# Altium PCB uku207_220_2.PcbDoc (part 4 of 4)
Units mm, origin at the board's own origin, x right, y up, seen from the top; angles counter-clockwise.
Board outline 334.15 x 155.4 mm, 2 copper layers (Top Layer, Bottom Layer); 372 components, 588 nets, 1281 pads, 677 vias.
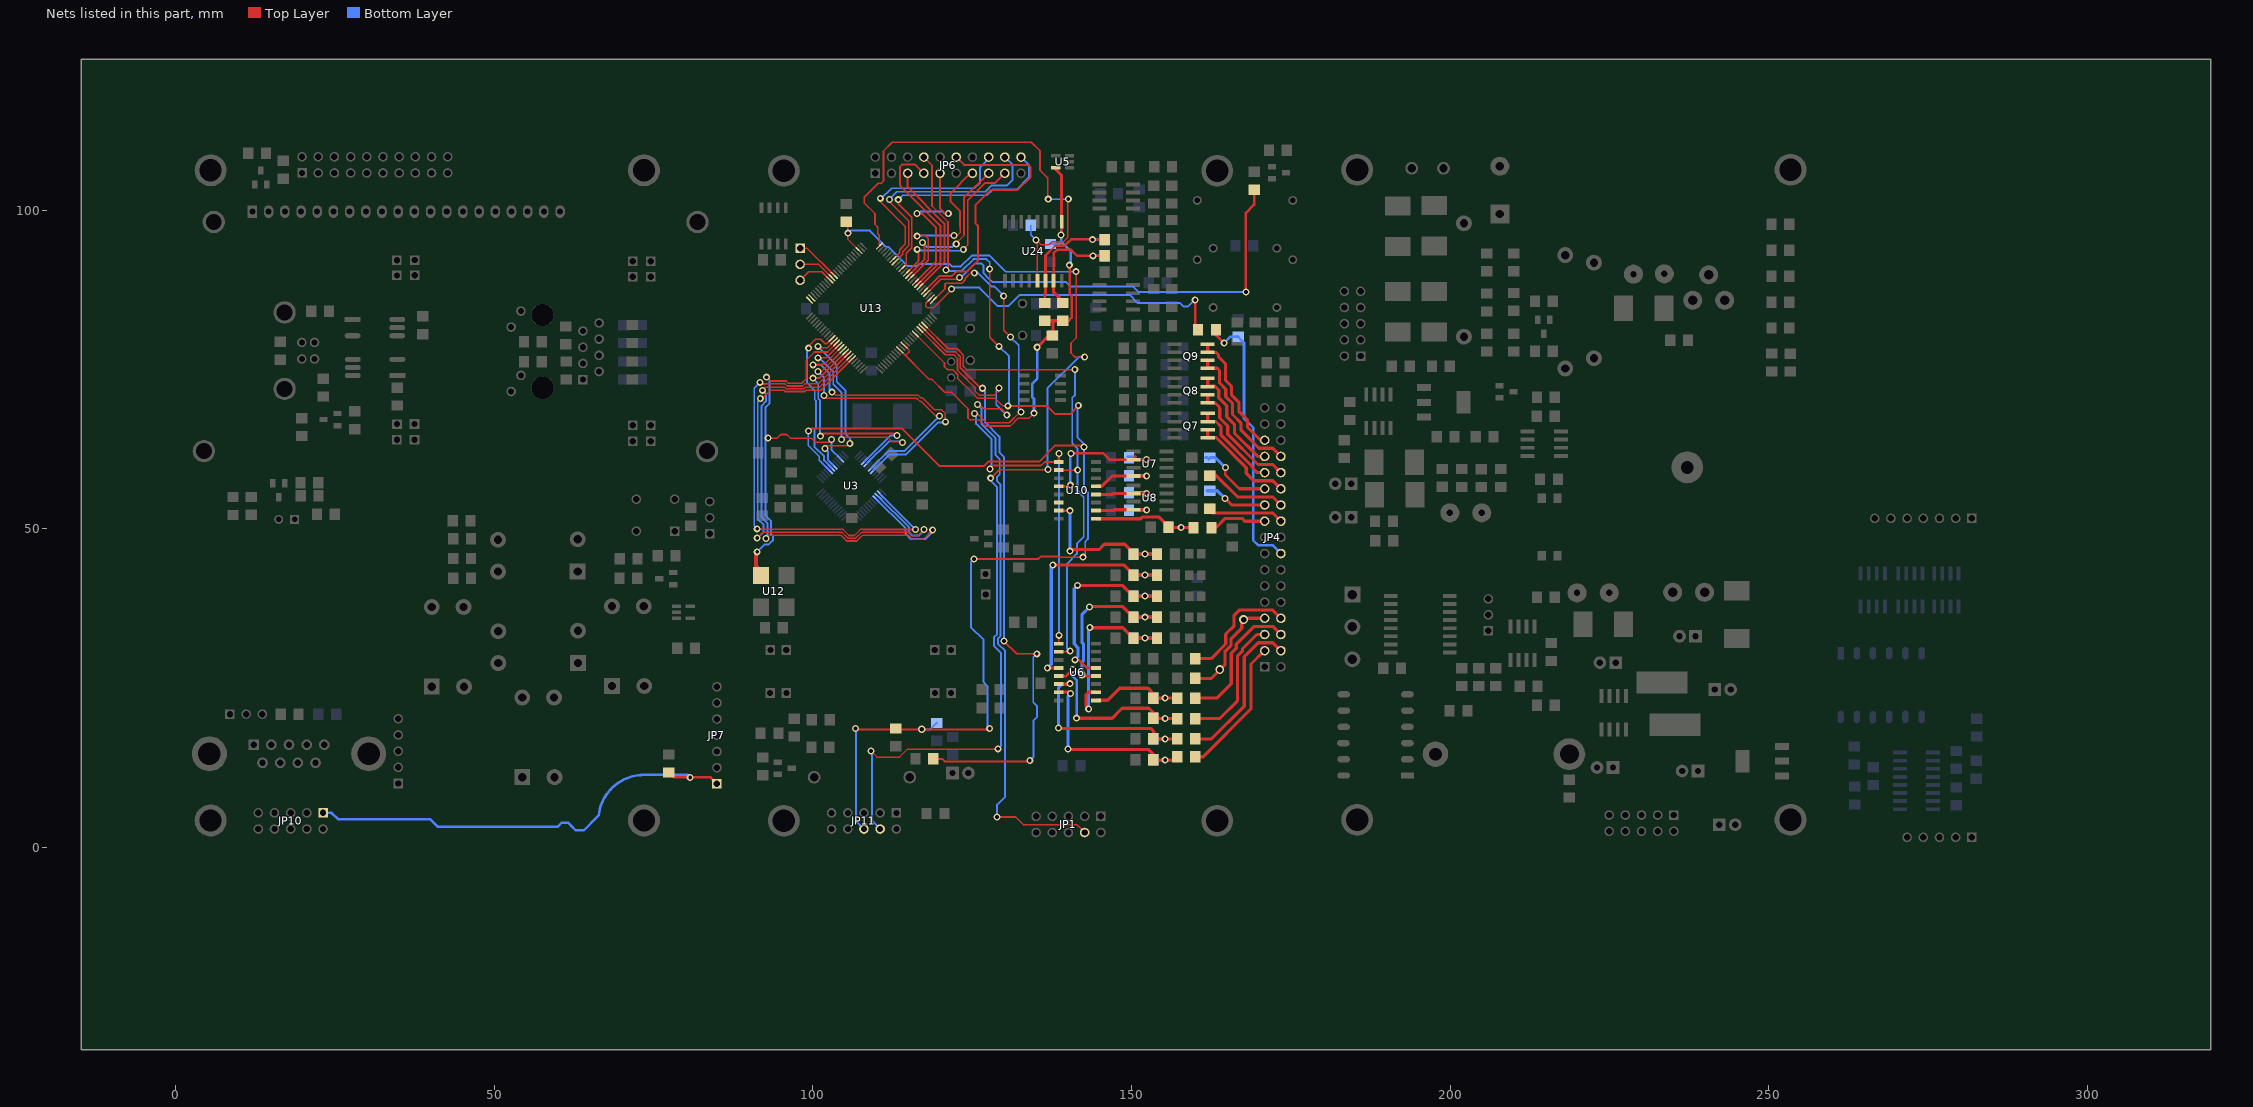
[diagram p4: the nets of this part, all layers, seen from the top]

## Via types
v1: diameter 1.1, hole 0.6, Top Layer to Bottom Layer, 590 vias
v2: diameter 1.3, hole 0.7, Top Layer to Bottom Layer, 36 vias
v3: diameter 1.5, hole 1, Top Layer to Bottom Layer, 18 vias
v4: diameter 1.5, hole 0.7, Top Layer to Bottom Layer, 16 vias
v5: diameter 1.2, hole 0.7, Top Layer to Bottom Layer, 13 vias
v6: diameter 1.4, hole 0.9, Top Layer to Bottom Layer, 3 vias
v7: diameter 1.2, hole 0.6, Top Layer to Bottom Layer, 1 vias

## Nets (pads, with @x,y where several pads share a name; then routed paths per layer and width w, separated by ;. In a path a pad name is that pad's centre, name@x,y a point inside that pad or via, vN(x,y) a via of type N, cw(c..) or ccw(c..) an arc to the next point about the centre after c; other vN are vias at no path point) (continued)
P0_29: R72.1 U13.29 | length 71.2
  Top Layer w0.25: U13.29@117.862,86.948 120.064,89.15 122.7,89.15 v1(123,89.45)
  Top Layer w0.4: v1(167.95,87.15) 167.95,99.6 169.243,100.893 169.243,103.226 R72.1@169.243,103.25
  Bottom Layer w0.3: v1(123,89.45) 123.258,89.45 125.43,91.622 126.481,91.622 126.781,91.322 126.781,90.119 127.618,89.283 128.15,88.75 139.7,88.75 140.4,88.05 150.2,88.05 151.1,87.15 v1(167.95,87.15)
P0_30: JP6.12 U13.30 | length 43.6
  Top Layer w0.3: U13.30@117.509,87.302 119.907,89.7 121.858,89.7 122.53,90.372 124.18,90.372 125.88,92.072 125.88,97.574 125.5,97.954 125.5,100.8 127.85,103.15 132.1,103.15 134.15,105.2 134.15,106.75 133.8,107.1 123.74,107.1 JP6.12@122.5,108.34
P1_0: U3.3 U13.95 | length 78.6
  Top Layer w0.25: v1(91.273,48.562) 92.161,49.45 104.581,49.45 105.499,48.532 106.705,48.532 107.623,49.45 115.15,49.45 115.7,48.9 116.45,48.9 v1(117.45,49.9) ; v1@91.65,70.25 91.75,70.25 91.85,70.25 91.9,70.3 93.35,71.75 95.426,71.75 95.616,71.56 98.784,71.56 98.974,71.75 101.25,71.75 U13.95@106.195,76.695
  Bottom Layer w0.3: v1(91.273,48.562) 92.273,49.562 92.273,50.613 91.35,51.536 91.35,69.95 v1@91.65,70.25 ; U3.3@110.251,55.072 115.1,50.223 115.1,49.45 115.6,48.95 116.65,48.95 117.45,49.75 v1(117.45,49.9)
  other v1: 91.75,70.45
P1_1: U3.4 U13.94 | length 81.1
  Top Layer w0.25: v1(92.1,71.75) 92.6,72.25 95.534,72.25 95.794,71.99 98.606,71.99 98.866,72.25 101.078,72.25 U13.94@105.841,77.013 ; v1(92.673,48.512) 93.161,49 104.423,49 105.32,48.102 106.883,48.102 107.781,49 114.95,49 115.55,48.4 117.35,48.4 v1(118.8,49.85)
  Bottom Layer w0.3: v1(92.1,71.75) 92.648,71.202 92.648,69.991 91.95,69.293 91.95,51.836 92.873,50.913 92.873,48.712 v1(92.673,48.512) ; U3.4@109.898,54.719 114.55,50.066 114.55,49.2 115.35,48.4 117.65,48.4 118.8,49.55 v1(118.8,49.85)
P1_4: U3.2 U13.93 | length 73.1
  Top Layer w0.25: v1@91.273,49.913 104.226,49.906 ; 92.55,72.75 95.642,72.75 95.972,72.42 98.428,72.42 98.758,72.75 100.836,72.75 U13.93@105.488,77.402 ; 104.226,49.913 104.726,49.913 105.677,48.962 106.527,48.962 107.477,49.913 107.877,49.913 ; 107.877,49.904 v1(116.1,49.9)
  Top Layer w0.3: v1(91.7,73) 91.95,72.75 92.55,72.75
  Bottom Layer w0.3: v1(91.273,50.013) 90.8,50.485 90.8,72.1 v1(91.7,73) ; U3.2@110.605,55.426 116.1,49.931 v1(116.1,49.9)
P1_8: U3.40 U13.92 | length 35.5
  Top Layer w0.3: v1(100,73.65) 101.029,73.65 U13.92@105.134,77.756 ; v1@101.15,64.55 101.175,64.575 101.6,65 112.85,65 v1(113.2,64.65)
  Bottom Layer w0.3: v1(100,73.65) 100.85,72.8 100.85,70.45 101.15,70.15 v1@101.15,64.55 ; U3.40@108.13,60.623 112.157,64.65 v1(113.2,64.65)
  other v1: 101.2,64.55
P1_9: U3.43 U13.91 | length 43.7
  Top Layer w0.25: v1(100.8,74.7) 101.371,74.7 U13.91@104.781,78.109 ; v1(101.75,70.95) 102.2,70.5 116.3,70.5 116.75,70.05 116.95,70.05 117.493,69.507 ; 117,70 117.493,69.507 ; v1(119.85,67.7) 119.3,67.7 117.493,69.507
  Bottom Layer w0.3: v1(100.8,74.7) 101.75,73.75 v1(101.75,70.95) ; U3.43@109.191,59.563 111.878,62.25 114.4,62.25 v1(119.85,67.7)
P1_10: U3.44 U13.90 | length 46.6
  Top Layer w0.25: v1(100,75.75) 100.1,75.85 101.814,75.85 U13.90@104.427,78.463 ; v1@103.15,71.45 103.575,71.025 103.6,71 116.5,71 116.95,70.55 117.25,70.55 119.1,68.7 120.2,68.7 120.8,68.1 v1(120.8,66.8)
  Bottom Layer w0.3: v1(100,75.75) 101.25,75.75 102.6,74.4 102.6,71.85 v1(103,71.45) ; U3.44@109.544,59.209 112.035,61.7 114.65,61.7 119.65,66.7 120.7,66.7 v1(120.8,66.8)
P1_14: U3.41 U13.89 | length 35.3
  Top Layer w0.25: v1(100.8,76.85) 102.107,76.85 U13.89@104.074,78.816 ; v1(104.5,64.05) 104.8,64.35 111.8,64.35 112.5,63.65 v1@113.7,63.65
  Top Layer w0.3: v1@113.7,63.65 113.95,63.65 v1(114.05,63.55)
  Bottom Layer w0.3: v1(100.8,76.85) 101,76.85 103.2,74.65 103.2,72.7 104.5,71.4 v1(104.5,64.05) ; U3.41@108.483,60.27 111.964,63.75 v1@113.8,63.75
P1_15: U3.34 U12.3 U13.88 | length 64.3
  Top Layer w0.25: v1(92.75,73.8) 93.35,73.2 95.8,73.2 96.15,72.85 98.25,72.85 99,73.6 99,76.5 100.25,77.75 102.3,77.75 U13.88@103.72,79.17 ; v1(93,64.25) 94.408,64.25 94.974,64.816 95.924,64.816 96.49,64.25 99.75,64.25 100.4,63.6 102.5,63.6 v1(102.95,64.05)
  Top Layer w0.6: v1@91.073,46.262 91.073,44.211 91.85,43.434 U12.3@91.85,42.7
  Bottom Layer w0.3: v1@91.172,46.261 91.298,46.387 92.472,47.561 93.073,47.561 93.724,48.211 93.724,48.962 93.424,49.262 93.424,51.263 92.6,52.086 v1@92.6,64.25 ; v1(92.75,73.8) 93.2,73.35 93.2,69.7 92.6,69.1 v1@92.6,64.25 ; v1(93,64.25) v1@92.6,64.25 ; v1(102.95,64.05) 102.95,62.373 U3.34@104.347,60.977
  other v1: 91.273,46.412
P1_16: U3.31 U13.87 | length 28.1
  Top Layer w0.25: v1(100.8,78.65) 101.05,78.4 102.243,78.4 U13.87@103.366,79.523 ; v1(101.9,62.6) 101.9,62.8 102.15,63.05 105.45,63.05 v1(105.8,63.4)
  Bottom Layer w0.25: U3.31@103.232,59.97 U3.31@103.286,59.916
  Bottom Layer w0.3: v1(100.8,78.65) 103.75,75.7 103.75,73.1 105.1,71.75 105.1,64.9 105.8,64.2 v1(105.8,63.4) ; v1(101.9,62.6) 102.35,62.15 102.35,60.852 U3.31@103.232,59.97
P1_17: U3.30 U13.86 | length 25.8
  Top Layer w0.25: v1(99.35,78.35) 99.35,78.7 100.4,79.75 101.25,79.75 101.95,79.05 102.186,79.05 U13.86@103.013,79.877
  Bottom Layer w0.3: v1(99.35,78.35) 99.05,78.05 99.05,73.15 99.085,73.115 99.085,72.915 100.3,71.7 100.3,70.3 100.5,70.1 100.5,65.85 100.25,65.6 100.25,62.9 101.75,61.4 101.75,60.745 U3.30@102.933,59.563
P1_18: JP6.5 U13.32 | length 21.8
  Top Layer w0.3: JP6.5@114.88,105.8 114.88,103.67 120.65,97.9 120.65,91.857 U13.32@116.801,88.009
P1_19: JP6.7 U13.33 | length 27
  Top Layer w0.3: U13.33@116.448,88.362 120,91.914 120,97.6 113.65,103.95 113.65,106.8 114,107.15 116.07,107.15 JP6.7@117.42,105.8
P1_20: JP6.9 U13.34 | length 25.5
  Top Layer w0.3: U13.34@116.094,88.716 119.35,91.972 119.35,97.25 117.1,99.5 v1@116.55,99.5 ; JP6.9@119.96,105.8 119.96,100.24 120.975,99.225 v1@121,99.2
  Bottom Layer w0.3: v1@116.55,99.5 116.85,99.8 120.4,99.8 120.975,99.225 v1@121,99.2
  other v1: 116.35,99.5 121.25,99.5
P1_21: JP6.11 U13.35 | length 25.7
  Top Layer w0.25: v1@116.95,98.25 117.5,98.25 117.8,97.95
  Top Layer w0.3: U13.35@115.741,89.069 118.75,92.079 118.75,97 117.8,97.95 ; v1@122.2,98.35 122.2,98.45 122.2,99.85 120.6,101.45 120.6,103.9 JP6.11@122.5,105.8
  Bottom Layer w0.3: v1@116.95,98.25 116.975,98.275 117.2,98.5 122.05,98.5 122.125,98.425 v1@122.15,98.4
  other v1: 116.95,98.3 122.15,98.45
P1_21: 
P1_22: 
P1_22: 
P1_22: 
P1_22: 
P1_22: 
P1_22: 
P1_22: 
P1_22: JP6.13 U13.36 | length 27.2
  Top Layer w0.25: v1@116.65,96.1 117.55,96.1 118.1,95.55 118.1,92.136 ; v1(122.15,96.05) 122.65,96.05 123.1,96.5 123.1,97.45
  Top Layer w0.3: U13.36@115.387,89.423 118.1,92.136 ; 123.1,97.45 123.1,99.85 121.6,101.35 121.6,102.7 124.7,105.8 JP6.13@125.04,105.8
  Bottom Layer w0.3: v1@116.65,96.05 v1(122.15,96.05) v1@122.2,96.1
  other v1: 116.378,95.923
P1_23: JP6.15 U13.37 | length 25.4
  Top Layer w0.25: v1@122.4,94.75 122.425,94.775 123.7,96.05 123.7,96.15
  Top Layer w0.3: U13.37@115.034,89.776 117.5,92.243 117.5,94.75 117.278,94.972 v1@117.15,95.1 ; 123.7,96.15 123.7,101.92 JP6.15@127.58,105.8
  Bottom Layer w0.3: v1@117.15,95.1 v1@117.2,95.05 ; v1@117.2,94.9 117.203,94.897 117.85,94.25 121.9,94.25 v1@122.4,94.75
  other v1: 122.5,94.7 117.228,94.923
P1_24: JP6.17 U13.38 | length 27
  Top Layer w0.25: v1(123.6,93.85) 124.3,94.55 124.3,95.35
  Top Layer w0.3: U13.38@114.68,90.13 116.55,92 v1@116.55,93.65 ; 124.3,95.35 124.3,101.55 127.05,104.3 128.62,104.3 JP6.17@130.12,105.8
  Bottom Layer w0.25: 121.6,93.65 123.4,93.65 v1(123.6,93.85)
  Bottom Layer w0.3: v1@116.55,93.65 121.6,93.65
  other v1: 116.378,93.873
P1_25: JP6.19 U13.39 | length 29.9
  Top Layer w0.3: U13.39@114.327,90.484 115.6,91.757 v1(115.578,92.872) ; v1(122.53,92.672) 123.75,92.672 124.9,93.823 124.9,101.35 127.3,103.75 130.61,103.75 JP6.19@132.66,105.8
  Bottom Layer w0.3: v1(115.578,92.872) 122.33,92.872 v1(122.53,92.672)
P1_25: 
P1_25: 
P1_25: 
P1_25: 
P1_25: 
P1_26: JP6.20 U13.40 | length 38
  Top Layer w0.25: v1(113.4,101.65) 113.4,101 115.5,98.9 115.5,94.1 114.65,93.25 114.65,91.514 U13.40@113.973,90.837
  Bottom Layer w0.3: v1(113.4,101.65) 114.1,102.35 127.3,102.35 128.2,103.25 132,103.25 133.9,105.15 133.9,107.1 JP6.20@132.66,108.34
P1_27: JP6.18 U13.43 | length 36.9
  Top Layer w0.25: v1@111.95,101.4 115.05,98.3 115.05,94.45 114.1,93.5 114.1,93.086 U13.43@112.912,91.898 ; U13.43@112.75,91.75 U13.43@112.905,91.905
  Bottom Layer w0.3: v1@111.95,101.4 111.95,101.676 111.95,101.7 111.977,101.727 113.15,102.9 127.05,102.9 128,103.85 130.4,103.85 131.35,104.8 131.35,107.11 JP6.18@130.12,108.34
  other v1: 112.028,101.676
P1_28: JP6.16 U13.44 | length 33.2
  Top Layer w0.25: v1@110.5,101.6 110.5,101.45 114.5,97.45 114.5,94.7 114.43,94.63 114.43,94.622 113.627,93.819 113.627,93.32 U13.44@112.559,92.251
  Bottom Layer w0.3: v1@110.5,101.6 110.676,101.776 112.35,103.45 125.35,103.45 126.25,104.35 126.25,106.75 127.58,108.08 JP6.16@127.58,108.34
  other v1: 110.577,101.875
P1_29: JP6.14 U13.45 | length 31.9
  Top Layer w0.25: v1@108.926,101.875 108.926,101.725 109.151,101.499 111.127,99.524 111.327,99.524 113.977,96.873 113.977,94.823 113.177,94.023 113.177,93.577 U13.45@112.205,92.605
  Bottom Layer w0.3: v1@109.126,101.875 111.527,104.275 122.83,104.275 123.73,105.175 123.73,106.776 125.04,108.086 JP6.14@125.04,108.34
  other v1: 109.226,101.575
P1_29: 
P1_29: 
P1_29: 
P1_29: 
P1_30: U6.10 U10.10 U13.21 | length 78.8
  Top Layer w0.25: U13.21@117.509,81.998 121.257,78.25 122.65,78.25 123.6,77.3 123.6,75.5 124.1,75 v1(141.1,75) ; U10.10@138.575,59.225 141.525,59.225 v1(141.55,59.25) ; U6.10@138.58,30.718 138.598,30.7 140.328,30.7 v1@140.385,30.758
  Bottom Layer w0.3: v1@140.385,30.758 140.335,30.808 139.85,31.293 139.85,44.476 141.436,46.062 141.436,47.698 142.5,48.762 142.5,55 141.55,55.95 v1(141.55,59.25) 141.55,62.55 140.7,63.4 140.7,70.55 141.05,70.9 141.05,70.95 ; 141.1,70.95 v1(141.1,75)
  other v1: 140.385,30.858
P1_31: 
P1_31: 
P1_31: 
P1_31: 
P1_31: 
P1_31: 
P1_31: 
P1_31: 
P1_31: 
P1_31: 
P1_31: 
P1_31: 
P1_31: 
P1_31: R22.1 U13.20 | length 94.6
  Top Layer w0.25: U13.20@117.155,81.645 121.03,77.77 122.381,77.77 123.131,77.019 123.131,75.269 126.332,72.068 v1(126.632,72.068)
  Top Layer w0.3: R22.1@118.892,13.91 120.274,13.91 120.677,13.507 133.887,13.507 v1(134.034,13.653) ; v1(129.983,32.408) 131.983,30.408 v1(135.134,30.408)
  Bottom Layer w0.3: v1(126.632,72.068) 127.032,71.668 127.032,66.717 129.283,64.466 129.283,62.016 129.983,61.315 v1(129.983,32.408) ; v1(134.034,13.653) 134.634,14.254 134.634,19.955 135.184,20.505 135.184,22.206 134.584,22.806 134.584,29.858 v1(135.134,30.408)
P2_0: U13.75
P2_1: U13.74
P2_7: U13.66 X13.1 | length 5.7
  Top Layer w0.25: X13.1@98,89 99.35,90.35 101.379,90.35 U13.66@102.659,89.069
P2_8: U13.65 X14.1 | length 5.9
  Top Layer w0.25: X14.1@98,91.5 100.936,91.5 U13.65@103.013,89.423
P2_9: U13.64 X9.1 | length 7.1
  Top Layer w0.25: X9.1@97.995,94.012 99.131,94.012 U13.64@103.366,89.777
P2_10: JP11.4 R9.2 U13.53 | length 169.3
  Top Layer w0.25: R9.2@105.325,98.224 105.5,98.049 v1(105.5,96.4) 105.45,96.35 105.45,95.471 U13.53@107.256,93.666 ; v1@109.35,14.85 109.1,15.1 v1(109.1,15.15) 110.05,14.2 113.6,14.2 114.85,15.45 129,15.45 v1(129.05,15.5) ; v1(127.9,57.95) 129.25,59.3 v1(136.9,59.3) ; v1(141.3,90.35) 141.3,79.95 140.5,79.15 140.5,77.6 141.15,76.95 v1(142.65,76.95)
  Bottom Layer w0.3: v1(105.5,96.4) 105.9,96.8 108.949,96.8 111.477,94.273 111.827,94.273 114.828,91.272 116.378,91.272 116.678,91.572 121.429,91.572 121.829,91.172 123.23,91.172 124.98,92.922 127.681,92.922 130.253,90.35 v1(141.3,90.35) ; v1(109.1,15.15) 109.3,14.95 109.3,4.17 JP11.4@110.56,2.91 ; v1(127.9,57.95) 127.9,57.55 128.9,56.55 128.9,33.5 128.45,33.05 128.45,31.6 129.55,30.5 129.55,16 v1(129.05,15.5) ; v1(136.9,59.3) 136.8,59.4 136.8,72.05 141.7,76.95 v1(142.65,76.95)
P2_13: R97.1 U13.50 U24.5 | length 74.9
  Top Layer w0.25: U13.50@110.438,94.373 110.438,96.065 110.178,96.324 110.178,97.347 109.75,97.775 109.75,99.475 108.077,101.148 108.077,102.05 110.254,104.226 110.728,104.226 111.078,104.576 111.078,109.278 112.478,110.678 134.284,110.678 135.634,109.328 135.634,106.277 136.884,105.026 v1@136.884,101.776 ; v1(135.034,95.324) v1@135.235,95.123 ; U24.5@135.235,88.925 v1@135.235,95.123 ; v1(140.085,101.776) 139.985,101.676 139.985,95.724 139.285,95.024 137.485,95.024 137.035,94.574 135.784,94.574 v1@135.235,95.123
  Bottom Layer w0.3: R97.1@134.196,97.618 134.196,96.162 v1(135.034,95.324) ; v1(136.934,101.726) v1@140.035,101.726
P3_25: R84.2 U13.27 | length 53.2
  Top Layer w0.25: U13.27@118.569,86.241 117.728,85.4 117.728,84.92 117.978,84.67 118.879,84.67 121.779,87.571 v1(121.779,87.621) ; R84.2@159.889,81.219 R84.2@159.939,81.169
  Top Layer w0.4: v1(159.99,85.922) 159.99,81.663 R84.2@160.437,81.216
  Bottom Layer w0.3: v1(121.779,87.621) 122.029,87.871 126.13,87.871 129.031,84.97 130.682,84.97 132.432,86.721 149.686,86.721 150.937,85.47 157.588,85.47 158.139,84.92 158.889,84.92 159.739,85.771 159.789,85.771 v1@159.84,85.822
P3_26: U6.9 U10.9 U13.26 | length 94.6
  Top Layer w0.25: U13.26@118.923,85.887 120.729,87.694 120.729,88.421 120.879,88.571 123.43,88.571 123.93,89.071 123.93,89.321 124.98,90.372 125.33,90.372 v1@125.53,90.372 ; v1@125.582,68.317 127.232,66.667 130.833,66.667 132.516,68.35 v1(132.65,68.35) ; v1(127.8,59.4) 128.35,59.95 135.85,59.95 136.395,60.495 U10.9@138.545,60.495 ; v1(129.95,86.55) 129.95,81.15 v1(131,80.1) ; U10.9@138.55,60.5 138.55,61.35 v1@138.6,61.4 ; U6.9@138.58,31.988 138.58,32.98 v1@138.6,33
  Bottom Layer w0.3: v1@125.507,68.243 125.63,68.12 125.63,68.117 125.63,66.466 128.031,64.065 128.031,59.631 v1(127.8,59.4) ; v1@125.53,90.372 125.678,90.372 128,88.05 128.45,88.05 v1(129.95,86.55) ; v1(131,80.1) 132.3,78.8 132.3,68.55 132.575,68.275 v1@132.7,68.15 ; v1@138.6,33 138.6,33.308 v1@138.6,61.4
  other v1: 138.635,33.308 138.635,61.816 125.382,68.117 125.33,90.172
PB1: 
PB1: 
PB2: 
PB2: 
PB3: 
PB3: 
PE6: 
PE6: 
PE7: 
PQ3: 
PQ4: 
PQ5: 
PQ6: 
PROG0: 
PROG1: 
PROG1: 
PROG1: 
PWM: D2.2 JP4.16 R84.1 | length 43.8
  Top Layer w0.4: R84.1@162.897,81.247 163.237,81.247 R84.1@163.237,81.216 163.237,80.425 164.491,79.17 v1(164.541,79.17)
  Bottom Layer w0.4: v1(164.541,79.17) 165.541,80.17 D2.2@166.68,80.17 ; D2.2@166.633,80.217 D2.2@166.68,80.17 ; D2.2@166.692,80.17 D2.2@166.68,80.17 ; JP4.16@173.44,46.13 172.17,47.4 169.9,47.4 169.1,48.2 169.1,65.9 167.65,67.35 167.65,79.2 166.704,80.146 166.686,80.164 D2.2@166.68,80.17
PWM1: 
PWM2: 
REL1: 
REL1: JP4.24 Q7.5 Q7.6 | length 17.1
  Top Layer w0.5: Q7.6@161.962,65.57 Q7.5@161.962,64.3 161.962,64.288 Q7.5@162.862,64.288 ; Q7.5@162.45,64.4 162.45,64.35 163.25,64.35 168,59.6 168,58.75 169.2,57.55 172.18,57.55 JP4.24@173.44,56.29
REL2: JP4.25 Q7.7 Q7.8 | length 14.4
  Top Layer w0.5: Q7.8@161.962,68.11 Q7.7@161.962,66.84 161.974,66.85 163.25,66.85 164.05,66.05 164.05,64.7 168.9,59.85 168.9,59.65 169.72,58.83 JP4.25@170.9,58.83
REL3: JP4.26 Q8.5 Q8.6 | length 20.1
  Top Layer w0.5: Q8.6@161.95,71.065 Q8.5@161.95,69.795 161.953,69.797 162,69.75 163.15,69.75 163.8,69.1 163.8,67.8 ; 163.85,68.9 163.85,67.4 165.1,66.15 165.1,64.85 169.85,60.1 172.17,60.1 JP4.26@173.44,58.83
REL4: JP4.27 Q8.7 Q8.8 | length 17.3
  Top Layer w0.5: Q8.8@161.95,73.605 Q8.7@161.95,72.335 162.015,72.4 163.1,72.4 163.7,71.8 163.7,70.55 164.95,69.3 164.95,67.6 166.15,66.4 166.15,65.05 169.83,61.37 JP4.27@170.9,61.37
REL5: JP4.28 Q9.5 Q9.6 | length 22
  Top Layer w0.5: Q9.5@161.95,75.195 Q9.5@161.95,75.2 ; Q9.6@161.95,76.465 Q9.5@161.95,75.2 ; JP4.28@173.44,61.37 172.16,62.65 170,62.65 167.2,65.45 167.2,66.6 165.85,67.95 165.85,69.7 164.8,70.75 164.8,71.9 163.8,72.9 163.8,74.85 163.45,75.2 Q9.5@161.95,75.2
REL6: JP4.29 Q9.7 Q9.8 | length 20
  Top Layer w0.5: Q9.8@161.95,79.005 Q9.7@161.95,77.735 161.943,77.742 161.9,77.7 161.95,77.7 163.25,77.7 163.65,77.3 163.65,77 164.75,75.9 164.75,73.3 165.7,72.35 165.7,71 166.85,69.85 166.85,68.45 168.2,67.1 168.2,65.95 170.24,63.91 JP4.29@170.9,63.91
RES: C29.2 JP6.8 JP11.6 R18.1 U3.29 U13.17 | length 248.4
  Top Layer w0.25: U13.17@116.094,80.584 120.65,76.028 120.65,75.45 121.15,74.95 122,74.95 122.75,74.2 122.75,73.6 124.962,71.388 125.832,70.518 128.565,70.518 129.765,69.317 v1(130.583,69.317) ; JP6.8@117.42,108.34 118.7,107.06 118.7,100.65 121.2,98.15 v1@121.2,90.75
  Top Layer w0.3: v1(99.3,65.35) 99.7,65.75 114,65.75 119.9,59.85 126.85,59.85 127.55,60.55 135.5,60.55 138.05,63.1 142.3,63.1 v1(142.55,62.85) ; v1(106.7,18.7) 106.85,18.55 127.6,18.55 v1(127.75,18.7) ; v1(125.3,45.3) 135.4,45.3 135.8,45.7 138.45,45.7 138.6,45.55 v1@142.386,45.55 ; v1(127.75,90.8) 127.75,80.1 v1(129.2,78.65) ; v1@130.4,69.3 136.7,69.3 138,68 140.35,68 141.65,69.3 v1(141.65,69.35)
  Bottom Layer w0.25: v1(99.3,65.35) 99.3,63.05 101,61.35 101,60.788 U3.29@102.579,59.209
  Bottom Layer w0.3: v1(106.7,18.7) 106.75,18.65 106.75,4.18 JP11.6@108.02,2.91 ; v5(117.1,18.55) 118.45,18.55 R18.1@119.457,19.558 ; v1(120.879,90.622) 121.029,90.472 123.38,90.472 125.23,92.322 127.231,92.322 127.75,91.803 v1(127.75,90.8) v1@127.7,90.75 ; v1(125.3,45.3) 124.8,44.8 124.8,34.55 126.781,32.569 126.781,25.955 127.4,25.336 127.4,19.05 v1(127.75,18.7) ; v1(129.2,78.65) 130.8,77.05 130.8,69.45 v1@130.65,69.3 ; v1(141.65,69.35) 141.6,69.3 141.6,69.15 141.55,69.1 141.55,64.3 142.55,63.3 142.55,56.3 143.15,55.7 143.15,48.426 142.736,48.012 142.736,45.912 v1(142.386,45.561) ; v1@142.386,45.55 v1@142.392,45.556
RX: 
RXCAN: 
SK1: JP4.23 R43.1 | length 15.6
  Top Layer w0.4: v1(164.742,59.615) 164.742,58.465 166.916,56.29 JP4.23@170.9,56.29
  Top Layer w0.5: 166.966,56.29 JP4.23@170.9,56.29
  Bottom Layer w0.5: R43.1@161.647,61.177 R43.1@161.897,61.177 ; R43.1@162.085,61.016 162.11,60.99 R43.1@162.15,60.95 ; R43.1@162.297,61.177 163.179,61.177 v1(164.742,59.615)
SK2: JP4.22 R45.1 | length 13.7
  Top Layer w0.5: R45.1@161.641,58.365 162.297,58.365 163.285,58.365 166.65,55 172.19,55 JP4.22@173.44,53.75
SK3: JP4.21 R50.1 | length 9.9
  Top Layer w0.5: v1(164.691,54.764) 165.705,53.75 JP4.21@170.9,53.75
  Bottom Layer w0.5: R50.1@161.897,55.976 R50.1@162.297,55.976 163.479,55.976 v1(164.691,54.764)
SK4: JP4.20 R52.1 | length 12.3
  Top Layer w0.5: R52.1@161.941,53.163 162.125,52.979 162.604,52.5 172.15,52.5 JP4.20@173.44,51.21
T3: 
T3: 
TD1: 
TX: 
U2: U10.14
U5: 
U6: 
U7: 
U8: 
UAKB: 
UB1: JP4.3 R25.2 | length 21.9
  Top Layer w0.5: R25.2@159.988,14.246 161.246,14.246 168.75,21.75 168.75,28.8 170.84,30.89 JP4.3@170.9,30.89
UB2: JP4.5 R29.2 | length 20.7
  Top Layer w0.5: R29.2@159.988,20.243 163.843,20.243 166.65,23.05 166.65,30.066 167.392,30.808 167.392,31.158 167.942,31.708 ; 167.95,31.7 169.68,33.43 JP4.5@170.9,33.43
UBM1: JP4.4 R27.2 | length 24.8
  Top Layer w0.5: R27.2@159.988,17.043 162.544,17.043 167.7,22.2 167.7,29.95 169.9,32.15 172.18,32.15 JP4.4@173.44,30.89
UBM2: JP4.6 R33.2 | length 21.8
  Top Layer w0.5: R33.2@159.988,23.443 163.394,23.443 165.65,25.7 165.65,30.466 166.442,31.258 166.442,31.908 166.892,32.358 ; 166.9,32.35 169.25,34.7 172.17,34.7 JP4.6@173.44,33.43
UIB1: C65.2 R122.2 R126.1 U24.7 | length 19
  Top Layer w0.4: U24.7@137.775,88.771 U24.7@137.775,88.925 137.775,93.264 138.284,93.773 140.534,93.773 141.45,92.857 v1(143.936,92.857) R122.2@145.763,92.857
  Top Layer w0.5: U24.7@137.775,88.925 137.775,87.125 139.194,85.707 R126.1@139.194,85.462
  Bottom Layer w0.4: v1(143.936,92.857) 143.953,92.873 145.797,92.873 C65.2@145.837,92.873
UIB2: C16.2 R62.2 R66.1 U24.6 | length 21
  Top Layer w0.4: R66.1@136.394,85.462 136.394,86.893 136.505,87.005 U24.6@136.505,88.925 136.505,92.894 138.033,94.423 139.484,94.423 140.034,94.973 ; 140.053,94.953 140.55,95.45 143.886,95.424 145.812,95.403 146.397,95.403 R62.2@146.45,95.35
  Bottom Layer w0.4: v1@143.887,95.424 C16.2@145.747,95.403 C16.2@146.347,95.403
  other v1: 143.886,95.374
ULOAD: JP4.19 R36.2 | length 9.2
  Top Layer w0.5: R36.2@162.528,50.193 R36.2@162.85,50.193 ; R36.2@162.85,50.2 163.25,50.2 164.7,51.65 167.35,51.65 167.79,51.21 JP4.19@170.9,51.21
US: JP4.7 R41.2 | length 17.3
  Top Layer w0.5: R41.2@159.988,26.543 162.544,26.543 163.878,27.878 164.65,28.65 164.65,30.716 165.592,31.658 165.592,32.708 167.292,34.409 167.292,35.409 167.617,35.734 167.853,35.97 JP4.7@170.9,35.97 ; v6(167.592,35.759) 167.597,35.754 v6@167.597,35.714
  other v6: 163.85,27.907
US1: 
US1: 
US1: 
US1: 
US1: 
US1: 
US1: 
US1: 
US1: 
UU1: C4.1 R24.1 R25.1 U6.15 | length 31.9
  Top Layer w0.5: U6.15@138.58,24.368 138.55,24.4 138.58,24.4 140.191,24.4 v1(140.435,24.156) ; v1(140.05,15.45) 140.1,15.4 152.642,15.4 153.389,14.654 153.389,13.757 153.389,13.743 153.412,13.743 155.289,13.743 v1@155.738,13.743 ; v1@154.989,13.703 155.289,13.703 156.645,13.703 R25.1@157.188,14.246
  Bottom Layer w0.4: C4.1@153.397,13.75 C4.1@154,13.75 ; C4.1@153.889,13.703 v1@154.986,13.703
  Bottom Layer w0.5: v1(140.05,15.45) 140.05,23.771 v1(140.435,24.156)
  other v1: 155.289,13.753
UU2: C5.1 R26.1 R27.1 U6.14 | length 33.6
  Top Layer w0.5: v1(138.55,18.75) 138.6,18.7 152.993,18.7 153.489,18.205 153.489,17.057 153.489,17.054 153.5,17.043 155.289,17.043 R27.1@157.188,17.043 ; 139.65,25.6 138.618,25.6 U6.14@138.58,25.638 140.267,25.638 v1(140.335,25.706)
  Bottom Layer w0.4: C5.1@153.397,17.052 153.898,17.052 C5.1@153.9,17.05
  Bottom Layer w0.5: v1(138.55,18.75) 138.55,25.1 139.05,25.6 140.229,25.6 v1(140.335,25.706) ; C5.1@153.489,17.052 153.898,17.052 155.287,17.052 v1(155.289,17.05)
UU3: C6.1 R28.1 R29.1 U6.13 | length 30
  Top Layer w0.4: U6.13@138.58,26.908 139.686,26.908 v1(140.735,27.957)
  Top Layer w0.5: v1(141.35,20.3) 146.95,20.3 148.5,21.85 152.744,21.85 153.875,20.719 154.351,20.243 v1(155.289,20.243) R29.1@157.188,20.243
  Bottom Layer w0.4: v1(140.735,27.957) 140.735,26.907 141.436,26.207 141.436,20.386 v1(141.35,20.3) ; C6.1@153.397,20.25 153.85,20.25 C6.1@153.855,20.255 ; C6.1@153.589,20.255 C6.1@153.855,20.255 ; C6.1@153.9,20.3 C6.1@153.855,20.255 ; v1@155.286,20.255 C6.1@153.855,20.255
  Bottom Layer w0.5: v1@141.3,20.35 v1(141.35,20.3)
UU4: C7.1 R32.1 R33.1 U6.1 | length 17.4
  Top Layer w0.5: U6.1@144.43,23.098 144.43,23.1 146.25,23.1 148.15,25 152.595,25 R32.1@153.439,24.156 ; R32.1@153.589,23.456 155.283,23.456 v1(155.289,23.45) ; R32.1@153.644,23.688 R32.1@153.732,23.6 ; v1@155.289,23.443 R33.1@157.188,23.443
  Bottom Layer w0.4: C7.1@153.397,23.45 C7.1@153.9,23.45 ; C7.1@153.412,23.457 155.282,23.457 v1(155.289,23.45) ; C7.1@153.839,23.456 v1@154.936,23.456
UU5: C9.1 D6.2 R47.2 R48.2 U6.2 | length 33
  Top Layer w0.5: v1(143.286,21.755) 142.836,22.206 142.836,23.936 143.25,24.35 143.268,24.368 U6.2@144.43,24.368 ; v1(143.45,34.55) 143.5,34.5 148.631,34.5 R48.2@150.288,32.843 150.301,32.857 v1(152.138,32.857) R47.2@153.995,32.859
  Bottom Layer w0.5: v1@143.25,21.755 143.25,34.35 v1(143.45,34.55) ; C9.1@150.3,32.85 150.307,32.857 v1(152.138,32.857) D6.2@153.995,32.859 152.996,32.859
UU6: C10.1 D7.2 R54.2 R55.2 U6.4 | length 29.6
  Top Layer w0.4: v7@142.236,27.157 142.236,27.107 142.435,26.908 U6.4@144.43,26.908
  Top Layer w0.5: v1(143.4,37.75) 143.45,37.8 148.631,37.8 R55.2@150.288,36.143 150.301,36.157 152.138,36.157 R54.2@153.995,36.159
  Bottom Layer w0.5: v7@142.25,27.157 142.25,29.107 142.486,29.343 142.486,31.908 142.25,32.144 142.25,36.6 v1(143.4,37.75) ; C10.1@150.288,36.143 150.298,36.144 150.3,36.144 150.4,36.15 v1(152.138,36.15) D7.2@153.995,36.159 152.996,36.159
  other v7: 142.186,27.157
UU7: C13.1 D8.2 R58.2 R59.2 U6.5 | length 34.1
  Top Layer w0.4: v1(141.136,29.457) 141.736,29.457 143.015,28.178 U6.5@144.43,28.178
  Top Layer w0.5: v1(141.5,41.15) 141.55,41.1 148.644,41.1 R59.2@150.294,39.45 ; 153.013,39.457 154,39.45 v1(152.138,39.45) R59.2@150.294,39.45 ; R59.2@150.294,39.45 R59.2@150.288,39.443 R59.2@150.294,39.45
  Bottom Layer w0.5: v1(141.136,29.457) 141.586,29.908 141.586,31.372 141,31.958 141,40.65 v1(141.5,41.15) ; C13.1@150.305,39.452 150.307,39.45 v1(152.138,39.45) D8.2@154,39.45
UU8: C24.1 D9.2 R68.2 R70.2 U6.12 | length 40.2
  Top Layer w0.5: v1(136.784,28.157) 138.552,28.157 U6.12@138.572,28.178 ; v1(137.65,44.35) 148.75,44.35 150.322,42.778 150.35,42.75 R70.2@150.305,42.752 ; U6.12@138.55,28.2 U6.12@138.572,28.178 ; U6.12@138.58,28.178 U6.12@138.572,28.178 ; R70.2@150.288,42.743 151.644,42.743 151.65,42.75 v1(152.138,42.75) 154,42.75 153.013,42.757
  Bottom Layer w0.5: v1(136.784,28.157) 137.4,28.773 137.4,44.1 v1(137.65,44.35) ; C24.1@150.305,42.752 150.307,42.75 v1(152.138,42.75) D9.2@153.989,42.761
UU9: C8.1 R35.1 R36.1 U10.1 | length 17.9
  Top Layer w0.5: U10.1@144.425,51.605 151.455,51.605 151.7,51.85 154.35,51.85 155.878,50.322 155.95,50.25 v1@157.74,50.213 ; v1(157.79,50.213) R36.1@159.64,50.213
  Bottom Layer w0.5: C8.1@155.85,50.25 155.857,50.243 v1(157.79,50.213)
UU10: R111.2 U8.8 U10.2 | length 12.5
  Top Layer w0.5: U10.2@144.425,52.875 147.125,52.875 147.25,53 150.289,53 152.302,53 v1@152.338,52.963
  Bottom Layer w0.5: R111.2@149.588,52.957 151.338,52.962 152.288,52.963 151.338,52.973 150.45,53
  other v1: 152.388,52.963
UU11: R118.2 U8.6 U10.4 | length 10.9
  Top Layer w0.5: U10.4@144.425,55.415 146.965,55.415 147.085,55.535 150.289,55.535 U8.6@150.435,55.535 ; U8.6@150.45,55.55 U8.6@150.435,55.535 ; v1(152.388,55.564) 152.359,55.535 U8.6@150.435,55.535
  Bottom Layer w0.5: R118.2@149.588,55.657 152.296,55.657 v1(152.388,55.564)
UU12: R129.2 U7.8 U10.5 | length 11.7
  Top Layer w0.5: U10.5@144.425,56.685 145.335,56.685 146.948,58.298 147.837,58.298 ; 147.837,58.315 U7.8@150.299,58.313 v1(152.388,58.315) ; U7.8@150.299,58.298 150.448,58.298 U7.8@150.45,58.3
  Bottom Layer w0.5: R129.2@149.588,58.357 150.394,58.357 ; 150.45,58.3 150.394,58.357 ; v1(152.388,58.315) 152.346,58.357 150.394,58.357
UU13: R128.2 U7.6 U10.12 | length 24.1
  Top Layer w0.4: U10.12@138.6,56.7 140.25,56.7 v1(140.4,56.85) ; v1(140.5,61.85) 145.6,61.85 146.613,60.838 U7.6@150.138,60.838 ; 150.6,61.3 150.226,60.926 U7.6@150.138,60.838 ; v1@152.488,60.865 152.461,60.838 152.338,60.838 150.299,60.838 U7.6@150.138,60.838
  Bottom Layer w0.4: v1(140.4,56.85) 140.4,61.75 v1(140.5,61.85) ; R128.2@149.45,61.3 149.588,61.3 150.6,61.3
  Bottom Layer w0.5: R128.2@149.588,61.157 149.879,60.865 v1(152.338,60.865) v1@152.488,60.865
UU14: C26.1 D10.2 R75.2 R76.2 U10.15 | length 26.5
  Top Layer w0.4: U10.15@138.575,52.875 v1@140.325,52.875
  Top Layer w0.5: v1@140.4,46.5 140.65,46.75 144.9,46.75 145.75,47.6 148.95,47.6 150.4,46.15 150.491,46.059 151.65,46.059 151.659,46.05 152.138,46.05 R75.2@153.995,46.059
  Bottom Layer w0.4: v1(140.35,46.5) v1(140.35,52.85)
  Bottom Layer w0.5: C26.1@150.3,46.05 150.309,46.059 v1(152.138,46.059) D10.2@153.995,46.059
VBAT: JP1.4 U13.19 | length 112.1
  Top Layer w0.25: U13.19@116.802,81.291 120.773,77.319 122.131,77.319 122.7,76.75 122.7,74.9 125.45,72.15 125.45,71.65 126.1,71 128.514,71 129.233,71.718 v1(129.233,72.118) ; v1@125.8,69.85 125.982,69.668 126.8,68.85 129.6,68.85 130.508,67.942 v1@130.583,67.867 ; v1(128.9,4.8) 131.834,4.8 133.034,3.601 141.407,3.601 JP1.4@142.647,2.361
  Bottom Layer w0.3: v1(125.832,69.518) 126.482,68.867 126.482,66.414 128.631,64.265 128.631,61.664 129.331,60.964 129.331,58.595 128.9,58.164 128.9,57.5 129.45,56.95 129.45,33.2 129.05,32.8 129.05,31.95 130.15,30.85 130.15,8 128.9,6.75 v1(128.9,4.8) ; v1(129.233,72.118) 128.782,71.668 128.782,69.518 v1(130.433,67.867) v1@130.583,67.867
VREF: C20.2 C25.2 R66.2 R126.2 U5.5 U13.10 U13.12 U24.9 | length 77.6
  Top Layer w0.25: U13.10@113.62,78.109 118.279,73.45 118.7,73.45 120.7,71.45 121.75,71.45 124.35,68.85 124.35,67.4 124.65,67.1 126.1,67.1 127.05,66.15 131,66.15 132.2,67.35 133.9,67.35 v1(134.7,68.15) ; U13.12@114.327,78.816 115.15,77.993 115.15,77.8 114.55,77.2
  Top Layer w0.4: R66.2@136.35,82.65 136.363,82.662 R66.2@136.394,82.662 R66.2@136.4,82.662 ; U24.9@139.045,98.175 139.045,96.655 139.05,96.65 ; R126.2@139.25,82.65 140.1,82.65 140.6,83.15 140.6,86.55 140.3,86.85 140.3,91.373 v1@140.3,91.45
  Top Layer w0.5: v1(135.2,78.5) 137.053,80.353 C25.2@137.597,80.353 ; R66.2@136.4,82.6 136.428,82.628 136.463,82.662 137.65,82.662 ; C25.2@137.7,80.3 137.7,80.353 137.7,82.612 137.65,82.662 ; U5.5@137.875,106.65 137.992,106.533 139,105.525 139,98.175 139,98.15 139.02,98.15 U24.9@139.045,98.175 ; R126.2@139.194,82.662 137.65,82.662
  Bottom Layer w0.3: 138.95,96.75 139.05,96.65
  Bottom Layer w0.4: v1(134.7,68.15) 134.7,70.4 134.4,70.7 134.4,72.75 135.2,73.55 v1(135.2,78.5) ; C20.2@137.288,94.706 138.717,94.706 139.01,94.999 ; v1@138.985,96.124 138.985,96.1 138.985,95.024 139.01,94.999 ; 139.035,95.024 139.01,94.999 ; v1@139.05,96.1 139.05,96.65 ; v1@140.3,91.45 140.435,91.585 140.435,93.574 139.01,94.999
  other v1: 140.235,91.373 138.95,96.1
VS: 
VS: JP4.8 R71.2 | length 19
  Top Layer w0.5: R71.2@159.988,29.643 162.494,29.643 164.796,31.945 164.796,33.512 166.092,34.809 166.092,36.459 166.883,37.25 172.16,37.25 JP4.8@173.44,35.97
WD_RES: JP7.1 JP10.1 R83.1 | length 72
  Top Layer w0.4: R83.1@77.407,11.792 78.2,11 83.947,11 JP7.1@84.948,10
  Bottom Layer w0.4: JP10.1@23.148,5.45 24.497,5.45 25.497,4.45 39.95,4.45 41.15,3.25 59.95,3.25 60.6,3.9 61.6,3.9 62.129,3.371 62.8,2.7 64.049,2.7 66.156,4.807 66.394,5.045 cw(c73.5,4.25) 73.497,11.4 80.35,11.4 v1(80.75,11)
pads on no net: D511.4 D511.5 D512.4 D512.5 J1.1 J1.6 J1.8 J1.9 J1.10 J1.11 J301.0 J301.7 J600.0 J600.3 JP4.1 JP4.2 JP4.30 JP6.10 JP10.8 JP10.9 JP10.10 JP500.3 JP500.4 JP500.5 JP500.6 JP500.7 JP500.8 JP501.2 U1.7 U1.8 U2.1 U2.5 U2.8 U3.1 U3.5 U3.6 U3.8 U3.9 U3.10 U3.11 U3.12 U3.25 U3.33 U3.38 U3.42 U3.45 U3.46 U4.3 U5.4 U9.1 U9.5 U9.8 U10.13 U11.5 U12.1 U13.1 U13.2 U13.3 U13.4 U13.5 U13.6 U13.14 U13.51 U13.52 U13.56 U13.67 U13.68 U13.69 U13.70 U13.73 U13.82 U13.85 U13.100 U14.3 U14.4 U14.5 U14.6 U16.3 U16.4 U16.5 U16.6 U17.11 U17.12 U17.13 U17.14 U18.3 U18.6 U18.7 U18.8 U18.10 U18.11 U24.12 U500.3 U500.6 U500.7 U500.8 U500.10 U500.11 U501.4 U501.8 U505.10 U505.11 U505.14 X603.1 X604.1 X605.1 X606.1
copper on no net:
  other v3: 89,6.3 178.9,6.35 258.35,6.35 89,8.3 178.9,8.35 258.35,8.35 258.3,44.55 258.3,46.55 35.65,61.35 37.65,61.35 48.641,78.503 48.641,80.503 35.65,94.6 37.65,94.6 88.95,102.75 178.95,102.75 88.95,104.75 178.95,104.75

## Polygon pours and split planes (outlines as drawn)
+3V3 on Top Layer (hatched 90Degree grid 0.1 track 0.3, remove dead copper): 99.5,58.15 99.5,55.3 104.65,50.15 107.5,50.15 112.75,55.4 112.75,58.25 107.85,63.15 104.3,63.15 99.5,58.35
GND on Top Layer (hatched 90Degree grid 0.1 track 0.3, remove dead copper): 99.02,55.101 104.451,49.67 107.699,49.67 113.23,55.201 113.23,58.449 108.049,63.63 104.101,63.63 99.02,58.549
NetC2_1 on Top Layer (hatched 90Degree grid 0.1 track 0.5, remove dead copper): -1.35,112.55 -1.35,24.95 50.05,24.95 50.05,22.45 62.5,22.45 62.5,25.05 88.6,25.05 88.6,115 -1.4,115 -1.4,111.4 -1.55,111.4
NetBT500_2 on Top Layer (hatched 90Degree grid 0.1 track 0.3, remove dead copper): 181.55,41.6 254.95,41.6 254.95,1.3 181.6,1.3 181.6,41.55
GND on Top Layer (hatched 90Degree grid 0.1 track 0.3, remove dead copper): 91.75,109.85 91.75,1.65 175.9,1.65 175.9,109.85
NetBT500_2 on Bottom Layer (hatched 90Degree grid 0.1 track 0.3, remove dead copper): 181.6,41.553 255.05,41.553 255.05,1.4 181.691,1.4 181.691,41.6
GND on Bottom Layer (hatched 90Degree grid 0.1 track 0.3, remove dead copper): 97.17,82.501 107.005,72.667 107.391,72.57 111.149,72.57 121.43,82.851 121.43,86.399 111.099,96.73 107.401,96.73 97.17,86.499
+3V3 on Bottom Layer (hatched 90Degree grid 0.1 track 0.3, remove dead copper): 107.45,73.05 110.95,73.05 120.95,83.05 120.95,86.2 110.9,96.25 107.6,96.25 97.65,86.3 97.65,82.7 107.25,73.1
NetC2_1 on Bottom Layer (hatched 90Degree grid 0.1 track 0.5, remove dead copper): -1.197,113.725 -1.197,24.975 50.003,24.975 50.003,22.425 62.503,22.425 62.503,24.975 89.003,24.975 89.003,114.975 -1.197,114.975
NetC500_1 on Bottom Layer (hatched 90Degree grid 0.1 track 0.5, remove dead copper): 181.6,46.35 259.6,46.35 259.6,115.3 181.697,115.3 181.697,46.4
GND on Bottom Layer (hatched 90Degree grid 0.1 track 0.3, remove dead copper): 91.85,1.65 175.8,1.65 175.8,109.8 91.8,109.8 91.8,1.65

## Keep-outs
Keep-Out Layer:
  circle w0.25: c11.3,120.8 r0
  circle w0.25: c11.3,120.8 r0
  circle w0.25: c11.3,120.8 r0
  circle w0.25: c11.3,120.8 r0
  circle w0.25: c11.3,120.8 r0
  circle w0.25: c11.3,120.8 r0
  circle w0.25: c11.3,120.8 r0
  circle w0.25: c11.3,120.8 r0
  lines w0.25: 9.8,60.4 9.85,60.35 ; 9.8,94.95 9.8,95.6 ; 9.8,95.1 9.8,60.35 ; 9.85,95.6 33.55,95.6 ; 11.8,62.35 33.85,62.35 ; 11.8,62.45 11.8,63.7 ; 11.8,62.7 11.8,93.6 ; 11.85,93.6 33.7,93.6 ; 17.5,44.75 33.25,44.75 33.25,22.75 1.75,22.75 1.75,44.75 17.55,44.75 ; 33.25,28.248 33.25,28.25 ; 33.598,62.359 cw(c33.55,61.4) 33.603,60.441 ; 33.598,95.559 cw(c33.55,94.6) 33.603,93.641 ; 33.6,60.35 9.8,60.35 ; 39.5,62.35 47.65,62.35 ; 39.55,93.6 47.7,93.6 ; 39.647,62.359 ccw(c39.7,61.4) 39.652,60.441 ; 39.647,95.559 ccw(c39.7,94.6) 39.652,93.641 ; 39.7,60.35 78.35,60.35 78.35,95.6 39.8,95.6 ; 47.682,62.355 47.682,76.457 cw(c48.641,76.403) 49.6,76.451 49.6,62.35 76,62.35 76,93.55 ; 47.682,93.605 47.682,82.505 ccw(c48.641,82.553) 49.6,82.5 49.6,93.6 76,93.6 ; 78.3,60.35 78.35,60.4 ; 87.991,100.748 cw(c88.95,100.7) 89.909,100.753 ; 87.991,106.797 ccw(c88.95,106.85) 89.909,106.802 ; 88,4.5 88,0 0,0 ; 88,10.25 88,101.05 ; 88,106.7 88,111.45 ; 88.041,4.298 cw(c89,4.25) 89.959,4.303 ; 88.041,10.347 ccw(c89,10.4) 89.959,10.352 ; 89.92,2.931 89.95,2.901 ; 89.92,10.1 89.92,100.8 ; 89.95,4.5 89.95,0 177.95,0 177.95,4.5 ; 89.95,106.7 89.95,111.4 ; 89.95,111.45 177.95,111.45 ; 91.7,26.15 91.7,29.15 ; 91.7,26.2 91.75,26.15 97.75,26.15 97.75,22.2 117.45,22.2 117.4,22.25 117.4,26.15 123.15,26.15 123.2,26.2 ; 91.75,29.15 97.75,29.15 97.75,44.7 107.5,44.7 ; 107.45,44.7 117.45,44.7 117.45,29.2 ; 117.45,29.15 123.15,29.15 123.2,29.1 ; 123.2,26.15 123.2,29.15 ; 177.948,106.7 177.948,111.35 ; 177.95,10.2 177.95,101 ; 177.991,4.348 cw(c178.95,4.3) 179.909,4.353 ; 177.991,10.397 ccw(c178.95,10.45) 179.909,10.402 ; 177.991,100.748 cw(c178.95,100.7) 179.909,100.753 ; 177.991,106.797 ccw(c178.95,106.85) 179.909,106.802 ; 179.894,10.251 179.894,100.874 ; 179.894,107.676 179.895,107.677 ; 179.9,4.25 179.9,0 257.35,0 ; 179.9,106.7 179.9,111.35 ; 179.9,111.45 257.3,111.45 ; 257.35,10.2 257.35,42.7 257.35,38.2 ; 257.35,48.2 257.35,111.35 ; 257.391,42.548 cw(c258.35,42.5) 259.309,42.553 ; 257.391,48.597 ccw(c258.35,48.65) 259.309,48.602 ; 257.4,0 257.4,4.5 ; 257.441,4.348 cw(c258.4,4.3) 259.359,4.353 ; 257.441,10.397 ccw(c258.4,10.45) 259.359,10.402 ; 259.35,-0.003 284.35,-0.003 ; 259.35,0 259.35,4.25 ; 259.35,10.15 259.35,42.8 ; 259.35,48.45 259.35,54.097 284.35,54.097 ; 0,0 0,0 ; 0,0 0,111.45 ; 0,111.45 88,111.45 ; 0,111.45 88,111.45 ; 9.8,60.35 9.8,60.35 ; 39.8,95.6 39.8,95.6 ; 89.95,111.4 89.95,111.4 ; 32.15,60.35 32.15,60.35 ; 41.46,95.6 41.46,95.6 ; 42.05,95.6 42.05,95.6 ; 88,95.574 88,95.574 ; 88,107.75 88,107.75 ; 88,109.178 88,109.178 ; 89.95,4.6 89.95,4.6 ; 177.95,94.424 177.95,94.424
  lines w0.254: 284.35,-0.003 284.35,35.729 284.233,35.846 cw(c287.568,40.179) 284.226,44.508 284.35,44.631 284.35,54.097

## Other copper
Top Layer:
  text "20704" at 16.054,90.223 h1
  text "20704" at 67.417,85.572 h1

## Silkscreen, mask and mechanical layers (free items; w line width, h text height)
Top Overlay:
  lines w0.25: 79.55,49.85 82.1,49.85 ; 154.05,30.959 154.1,30.909 154.1,28.359
Bottom Overlay:
  lines w0.25: 153.35,31.609 153.35,34.159 ; 153.35,34.909 153.35,37.459 ; 153.35,44.809 153.35,47.359 ; 153.355,38.2 153.355,40.75 ; 153.355,41.5 153.355,44.05 ; 165.413,79.509 167.963,79.509 ; 165.55,93.15 165.55,95.75
Mechanical 1:
  circle w0.254: c73.5,4.25 r5.5
  circle w0.254: c73.5,4.25 r2.5
  lines w0.2: 119.13,24.206 119.15,24.226
  lines w0.25: 33.897,10 36.797,10 ; 34.947,8.5 34.947,11.05 ; 84.297,10 85.547,10 ; 84.947,8.65 84.947,10.85 ; 235.1,2.51 236.94,4.35 253.4,4.35 ; 280.8,1.647 283.35,1.647 ; 281,51.647 283.2,51.647 ; 281.85,0.597 281.85,3.497 ; 281.85,50.997 281.85,52.247 ; 284.35,-0.003 284.35,1.647 ; 33.297,7.5 34.947,7.5 87.397,7.5 87.397,30 33.297,30 33.297,7.5
  lines w0.254: 69.146,7.617 cw(c73.479,4.282) 77.808,7.624 ; 95.65,23.7 95.65,31.35 ; 95.65,27.2 119.85,27.2 ; 98.15,23.55 98.15,31.45 ; 117.45,23.45 117.45,31.35 ; 119.95,23.15 119.95,31.3
  lines w0.3: 107.45,28.7 115.45,28.7 115.45,42.7 99.45,42.7 99.45,28.7 107.5,28.7
Mechanical 3:
  lines w0.254: 11.05,61.3 11.05,94.15 ; 34.741,63.973 37.527,63.973 37.55,63.95 ; 34.741,89.773 37.519,89.773 37.545,89.8 ; 34.741,92.173 37.519,92.173 37.545,92.2 ; 34.745,66.462 37.545,66.462 37.545,59.355 37.545,95.345 37.55,95.35 ; 40,61.75 40,96.35 ; 41.5,62.1 41.5,96.9

## Text inside footprints (layer, text, board x,y; h text height)
JP5: Top Overlay "20" at 44.234,107.882 h1; Top Overlay "19" at 44.234,105.342 h1
JP10: Top Overlay "10" at 11.463,3.418 h1.27 r180; Top Overlay "9" at 11.463,5.958 h1.27 r180; Top Overlay "1" at 25.179,5.958 h1.27 r180; Top Overlay "2" at 25.687,3.418 h1.27 r180